# Altium PCB PCB_Carte_PIC18F.PcbDoc
Units mil, origin at the board's own origin, x right, y up, seen from the top; angles counter-clockwise.
Board outline 6000 x 4000 mil, 2 copper layers (Top Layer, Bottom Layer); 19 components, 18 nets, 53 pads, 0 vias.
Unrouted connection lines stored in the file: 31.
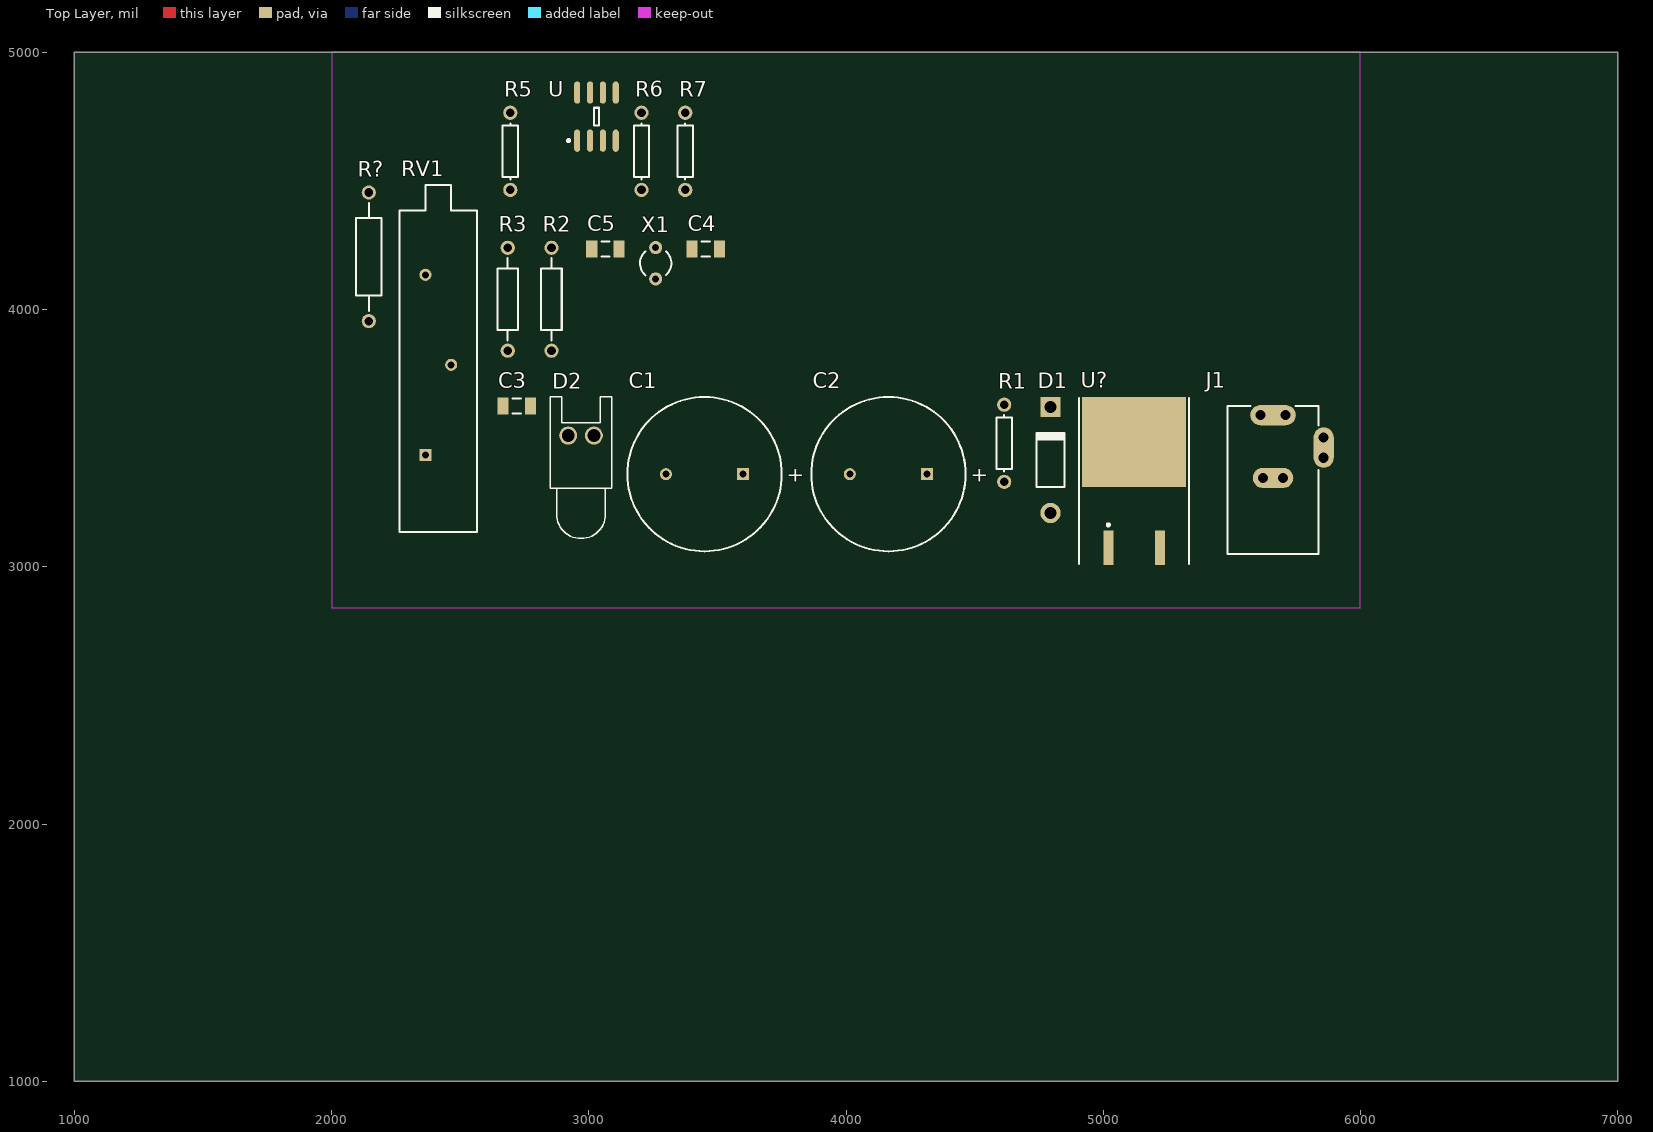
[diagram p0: Top Layer view]
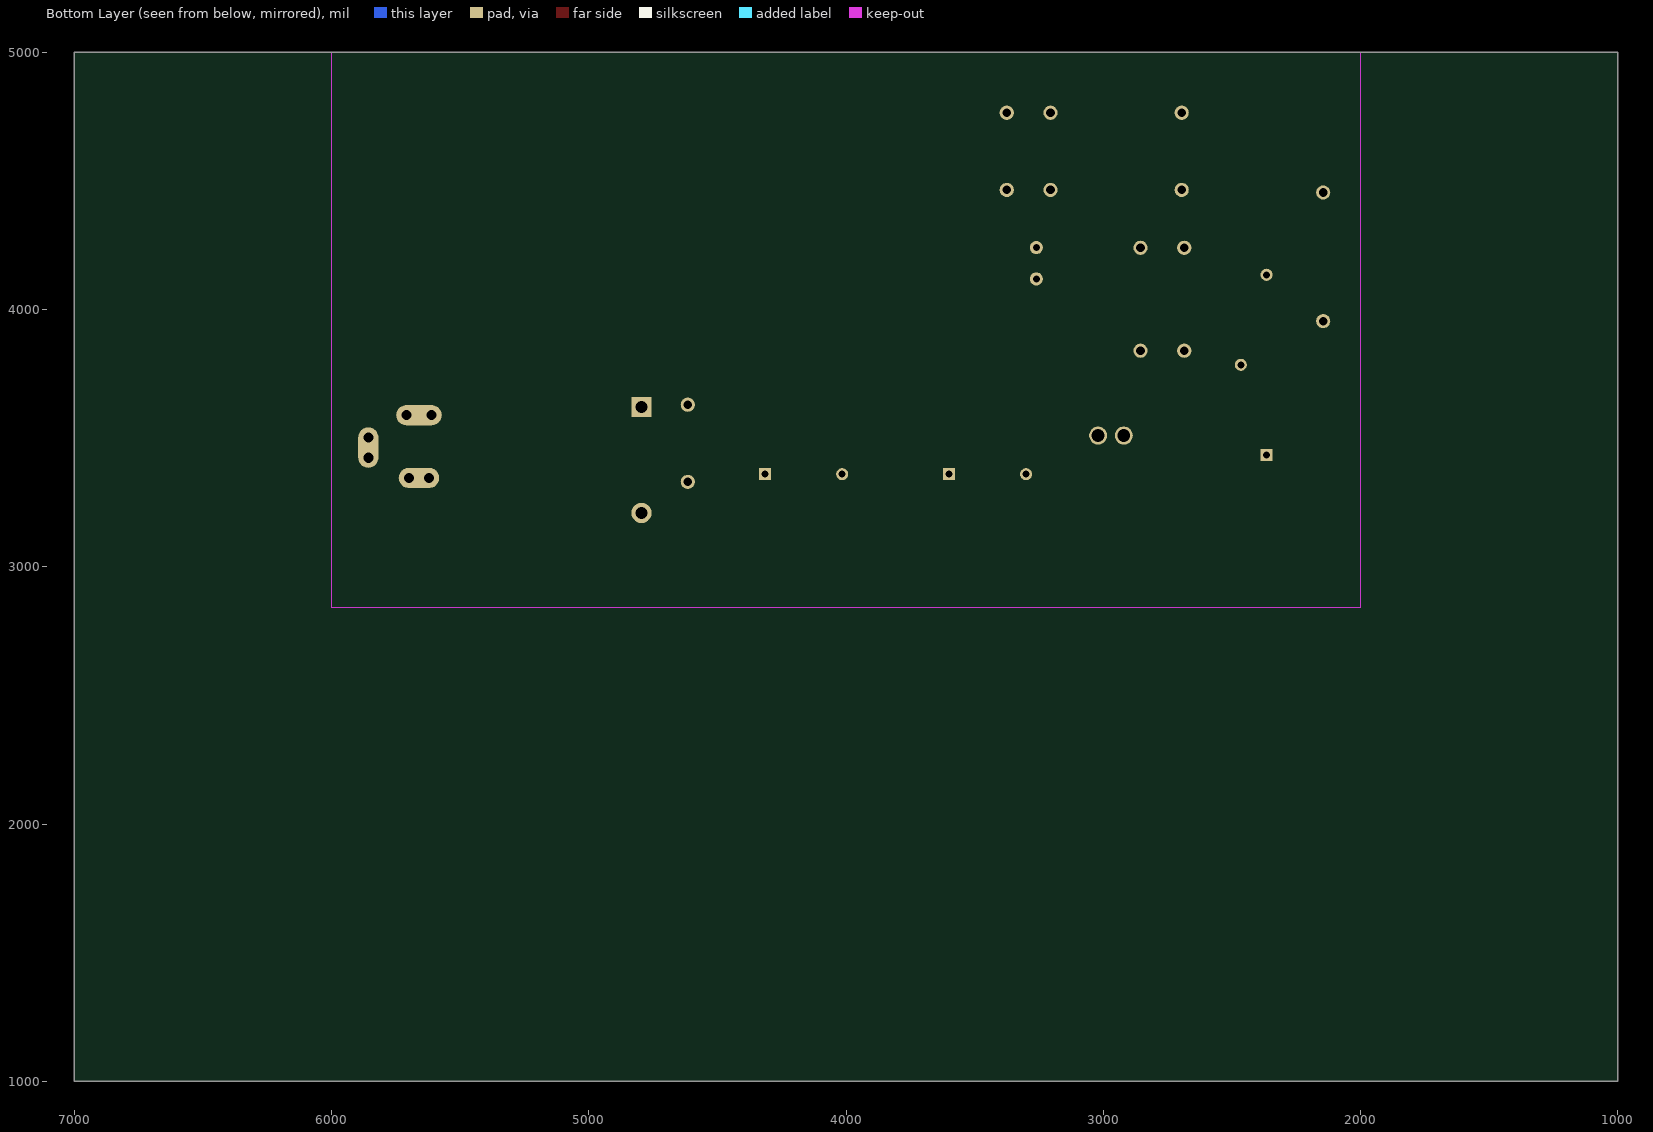
[diagram p1: Bottom Layer view, seen from below]

## Layer stack, top to bottom
Top Solder: solder mask 0.4, Solder Resist, Dk 3.5
Top Layer: signal copper 1.4
Dielectric 1: dielectric 12.6, FR-4, Dk 4.8
Bottom Layer: signal copper 1.4
Bottom Solder: solder mask 0.4, Solder Resist, Dk 3.5

## Board outline
1000,1000 7000,1000 7000,5000 1000,5000

## Design rules (kind name [scope] priority, off if disabled: settings)
Clearance [All] p1: gap=10 ignorepadtopadclearanceinfootprint=FALSE except(0: Arc-Hole Track-Hole SMDPad-Hole THPad-Hole Via-Hole Fill-Hole Poly-Hole Region-Hole Text-Hole)
PolygonConnect [All] p1: connectstyle=Relief reliefconductorwidth=10 reliefentries=4 polygonreliefangle="90 Angle" airgapwidth=10
RoomDefinition U_Sensor [InComponentClass('U_Sensor')] p1: confinementstyle=ConfineIn formatcopy=TRUE lockcomponents=FALSE outline 2655,4425 3470,4425 3470,4905 2655,4905
RoomDefinition U_Power [InComponentClass('U_Power')] p2: confinementstyle=ConfineIn formatcopy=TRUE lockcomponents=FALSE outline 2630,2995 5910,2995 5910,3770 2630,3770
RoomDefinition U_MCU [InComponentClass('U_MCU')] p3: confinementstyle=ConfineIn formatcopy=TRUE lockcomponents=FALSE outline 2635,3800 3545,3800 3545,4380 2635,4380
RoomDefinition U_AFF [InComponentClass('U_AFF')] p4: confinementstyle=ConfineIn formatcopy=TRUE lockcomponents=FALSE outline 2085,3125 2575,3125 2575,4595 2085,4595
RoutingVias [All] p1: holewidth=28 width=50 viastyle="Through Hole" minholewidth=28 minwidth=50 maxholewidth=28 maxwidth=50
SolderMaskExpansion [All] p1: expansion=4 istentingtop=FALSE
Width [All] p1: maxlimit=10 minlimit=10 preferedwidth=10
30 further rules are at their usual default settings.

## Classes and differential pairs
net class "Data [0..7]": "Data 0" "Data 1" "Data 2" "Data 3" "Data 4" "Data 5" "Data 6" "Data 7"
component class U_Sensor: R5 R6 R7 U U2
component class U_Power: C1 C2 C3 D1 D2 J1 R1 U?
component class U_MCU: B1 C4 C5 R2 R3 U1 X1
component class U_AFF: AFF1 R? RV1

## Components (designator, comment, footprint, x,y, rotation, side; value= is the part's Value field where it differs from the comment)
C1 "Cap Pol1" RB7.6-15 3450,3360 r0 top value=100pF
C2 "Cap Pol1" RB7.6-15 4165,3360 r0 top value=100pF
C3 "Cap Semi" C1206 2720,3625 r0 top value=100pF
C4 "Cap Semi" C1206 3455,4235 r0 top value=27pF
C5 "Cap Semi" C1206 3065,4235 r0 top value=27pF
D1 "Diode 1N4001" DO-41 4795,3415 r90 top
D2 "LED0" LED-0 2970,3510 r0 top
J1 "PWR2.5" KLD-0202 5660,3050 r90 top
R1 "Res1" AXIAL-0.3 4615,3480 r90 top value=1K
R2 "Res2" AXIAL-0.4 2855,4040 r90 top value=10K
R3 "Res2" AXIAL-0.4 2685,4040 r90 top value=100K
R5 "Res1" AXIAL-0.3 2695,4615 r90 top value=10K
R6 "Res1" AXIAL-0.3 3205,4615 r90 top value=4K7
R7 "Res1" AXIAL-0.3 3375,4615 r90 top value=4K7
R? "Res Semi" AXIAL-0.5 2145,4205 r90 top value=1K
RV1 "Res Tap" VR3 2415,3785 r90 top value=4K7
U "TCN75" SOIC127P600X175-8N 3030,4750 r90 top
U? "L7805ABD2T" TO-263 5120,3280 r0 top
X1 "XTAL" R38 3260,4180 r0 top

## Footprints (in the part's own frame and the unit in brackets; to place one, negate y for a bottom-side part, rotate by r counter-clockwise, add the part's x,y. Pads: shape width x height; smd on the part's side, far side on the other; paste and mask are expansions set on the pad)
AXIAL-0.3 [mm] "Axial Device, Thru-Hole; 2 Leads; 0.3 in Pin Spacing"
  round 1.4 hole 0.85: 1(-3.81,0) 2(3.81,0)
  silkscreen extent -2.77,-0.76 2.77,0.76
AXIAL-0.4 [mm] "Axial Device, Thru-Hole; 2 Leads; 0.4 in Pin Spacing"
  round 1.4 hole 0.85: 1(-5.08,0) 2(5.08,0)
  silkscreen extent -4.06,-1.02 4.06,1.02
AXIAL-0.5 [mm] "Axial Device, Thru-Hole; 2 Leads; 0.5 in Pin Spacing"
  round 1.4 hole 0.85: 1(-6.35,0) 2(6.35,0)
  silkscreen extent -5.33,-1.27 5.33,1.27
C1206 [mm] "Chip Capacitor, Body 3.2x1.6mm, IPC High Density"
  rect 1.1x1.7 smd: 1(-1.35,0) 2(1.35,0)
  silkscreen extent -0.4,-0.75 0.4,0.75, body extent -1.7,-0.9 1.7,0.9, height 1.3
DO-41 [mm] "Diode, Axial; Body 5.2 x 2.7 mm (LxDia. max), Lead Dia. 0.86 mm (max)"
  round 2 hole 1.2: 1(-5.23,0)
  rect 2x2 hole 1.2: 2(5.23,0)
  silkscreen extent -2.65,-1.4 2.75,1.4
KLD-0202 [mm] "DC Power Jack, 2.5mm, KLD Series, PCB Mount"
  oval 2x4.5 all layers, no hole: 1(13.7,0)
  round 1.5 hole 1: 1A(13.7,-1.25) 1B(13.7,1.25) 2A(7.5,-1) 2B(7.5,1) 3A(9.5,-5) 3B(11.5,-5)
  oval 2x4 all layers, no hole: 2(7.5,0)
  oval 4x2 all layers, no hole: 3(10.5,-5)
  silkscreen extent 0,-4.5 14.6,4.5
LED-0 [mil] "LED; 2 Leads"
  round 70 hole 50: 1(50,0) 2(-50,0)
  silkscreen extent -120,-400 120,150
R38 [mm] "Crystal, Thru-Hole; 2 Leads; Body 3.1 x 8.2 mm (Dia.xH)"
  round 1.3 hole 0.7: 1(0,1.55) 2(0,-1.55)
  silkscreen extent -1.55,-1.19 1.55,1.17
RB7.6-15 [mm] "Polarized Capacitor (Radial); 2 Leads"
  rect 1.2x1.2 hole 0.7: 1(3.81,0)
  round 1.2 hole 0.7: 2(-3.81,0)
  silkscreen extent -7.62,-7.62 7.62,7.62
SOIC127P600X175-8N [mm] "SOIC, 8-Leads, Body 0,42x0,18mm, Pitch 1,27mm, IPC Medium Density"
  oval 2.2x0.6 smd: 1(-2.375,1.905) 2(-2.375,0.635) 3(-2.375,-0.635) 4(-2.375,-1.905) 5(2.375,-1.905) 6(2.375,-0.635) 7(2.375,0.635) 8(2.375,1.905)
  silkscreen extent -2.5,-0.25 0.88,2.88, body extent -0.15,-0.25 0.15,0.25, height 1.75
TO-263 [mm] "D2-PAK/TO-263-AB; 3 Leads (1 Cropped); Body 15.9 (inc. leads) x 10.4 mm (LxW max)"
  rect 1x3.4 smd: 1(-2.54,-5.225) 3(2.54,-5.225)
  rect 10.25x8.9 smd: 4(0,5.225)
  silkscreen extent -5.43,-6.83 5.43,9.57
VR3 [mm] "Thru-Hole; 3 Leads"
  rect 1.2x1.2 hole 0.7: 1(-8.89,1.27)
  round 1.2 hole 0.7: 2(0,-1.27) 3(8.89,1.27)
  silkscreen extent -16.51,-3.81 17.78,3.81

## Part data
C1 C2: "Polarized Capacitor (Radial)", LatestRevisionDate=17-Jul-2002, LatestRevisionNote="Re-released for DXP Platform.", PackageDescription="Polarized Capacitor (Radial); 2 Leads", PackageReference=RB7.6-15, Published=8-Jun-2000, Publisher="Altium Limited"
C3 C4 C5: "Capacitor (Semiconductor SIM Model)", LatestRevisionDate=29-May-2009, LatestRevisionNote="IPC-7351 Footprint Added.", PackageDescription="Chip Capacitor", PackageReference=C1206, Published=8-Jun-2000, Publisher="Altium Limited"
D1: "1 Amp General Purpose Rectifier", Code_JEDEC=DO-204-AL, ComponentLink1Description="Manufacturer Link", ComponentLink1URL=http://www.fairchildsemi.com/, ComponentLink2Description=Datasheet, ComponentLink2URL=http://www.fairchildsemi.com/ds/1N%2F1N4001.pdf, DatasheetVersion=1998, LatestRevisionDate=17-Jul-2002, LatestRevisionNote="Re-released for DXP Platform.", PackageDescription="Diode, Axial; Body 5.2 x 2.7 mm (LxDia. max), Lead Dia. 0.86 mm (max)", PackageReference=DO-41, PackageVersion=Aug-1999, Published=8-Jun-2000, Publisher="Altium Limited"
D2: "Typical INFRARED GaAs LED", LatestRevisionDate=08-Jul-2005, LatestRevisionNote="Mech Layer 1 removed.", PackageDescription="LED; 2 Leads", PackageReference=LED-0, Published=8-Jun-2000, Publisher="Altium Limited"
J1: "Low Voltage Power Supply Connector", ComponentLink1Description="Manufacturer Link", ComponentLink1URL=http://domino.kycon.com/internet/Products.html, DatasheetDocument=09-May-2002, Published=17-Dec-2003, Publisher="Altium Limited"
R1 R2 R3 R5 R6 R7: "Resistor", LatestRevisionDate=17-Jul-2002, LatestRevisionNote="Re-released for DXP Platform.", Published=8-Jun-2000, Publisher="Altium Limited"
  R1 R5 R6 R7: PackageDescription="Axial Device, Thru-Hole; 2 Leads; 0.3 in Pin Spacing", PackageReference=AXIAL-0.3
  R2 R3: PackageDescription="Axial Device, Thru-Hole; 2 Leads; 0.4 in Pin Spacing", PackageReference=AXIAL-0.4
R?: "Semiconductor Resistor", LatestRevisionDate=17-Jul-2002, LatestRevisionNote="Re-released for DXP Platform.", PackageDescription="Axial Device, Thru-Hole; 2 Leads; 0.5 in Pin Spacing", PackageReference=AXIAL-0.5, Published=8-Jun-2000, Publisher="Altium Limited"
RV1: "Tapped Resistor", LatestRevisionDate=17-Jul-2002, LatestRevisionNote="Re-released for DXP Platform.", PackageDescription="Variable Resistor, Thru-Hole; 3 Leads", PackageReference=VR3, Published=24-Mar-1999, Publisher="Altium Limited", Set Position=0.5, Sim Note="Enter the Resistance value and the set point into parameter fields."
U?: "Precision 1A Regulator", ComponentLink1Description="Manufacturer Link", ComponentLink1URL=http://www.st.com/, ComponentLink2Description=Datasheet, ComponentLink2URL=http://www.st.com/stonline/products/literature/ds/2144/l7805ab.pdf, DatasheetVersion=Nov-1999, LatestRevisionDate=17-Jul-2002, LatestRevisionNote="Re-released for DXP Platform.", PackageDescription="D2-PAK/TO-263-AB; 3 Leads (1 Cropped); Body 15.9 (inc. leads) x 10.4 mm (LxW max)", PackageReference=TO-263, Published=24-Aug-2001, Publisher="Altium Limited"
X1: "Crystal Oscillator", LatestRevisionDate=17-Jul-2002, LatestRevisionNote="Re-released for DXP Platform.", PackageDescription="Crystal, Thru-Hole; 2 Leads; Body 3.1 x 8.2 mm (Dia.xH)", PackageReference=R38, Published=8-Jun-2000, Publisher="Altium Limited"

## Nets (pads, with @x,y where several pads share a name; then routed paths per layer and width w, separated by ;. In a path a pad name is that pad's centre, name@x,y a point inside that pad or via, vN(x,y) a via of type N, cw(c..) or ccw(c..) an arc to the next point about the centre after c; other vN are vias at no path point)
+5: C2.1 C3.2 R1.1 R2.2 R5.2 R6.2 R7.2 R?.1 RV1.1 U.8 U?.3
+12: D1.1 J1.2 J1.2A J1.2B J1.3 J1.3A J1.3B
E: 
GND: C1.2 C2.2 C3.1 C4.1 C5.1 D2.2 J1.1 J1.1A J1.1B R3.1 U.4 U.5 U.6 U?.4
MCLR: R2.1
NetB1_1: R3.2
NetAFF1_15: R?.2
NetC1_1: C1.1 D1.2 U?.1
NetD2_1: D2.1 R1.2
NetR5_1: R5.1 U.7
OSC1: C4.2 X1.2
OSC2: C5.2 X1.1
RA0: 
RD0: 
RD1: 
SCL: R7.1 U.2
SDA: R6.1 U.1
VEE: RV1.3
pads on no net: RV1.2 U.3

## Keep-outs
Keep-Out Layer:
  rectangle: 2000,2840 6000,5000

## Text inside footprints (layer, text, board x,y; h text height)
C1: Top Overlay "+" at 3770.15,3330.99 h59.06
C2: Top Overlay "+" at 4485.15,3330.99 h59.06
J1: Mechanical 1 "Mech 2 - Clearance, move to internal plane if present" at 5460.56,3061.26 h11.81 r90; Mechanical 1 "Mech 1 - Slot cut-out" at 5440.87,3061.26 h11.81 r90; Mechanical 1 "Assign keep-out area to slot" at 5401.5,3061.26 h11.81 r90; Mechanical 1 "Alert PCB fab to slot details" at 5421.19,3061.26 h11.81 r90